# Altium PCB PCB_2darlington.PcbDoc
Units mm, origin at the board's own origin, x right, y up, seen from the top; angles counter-clockwise.
Board outline 150 x 100 mm, 2 copper layers (Top Layer, Bottom Layer); 45 components, 31 nets, 106 pads, 14 vias.
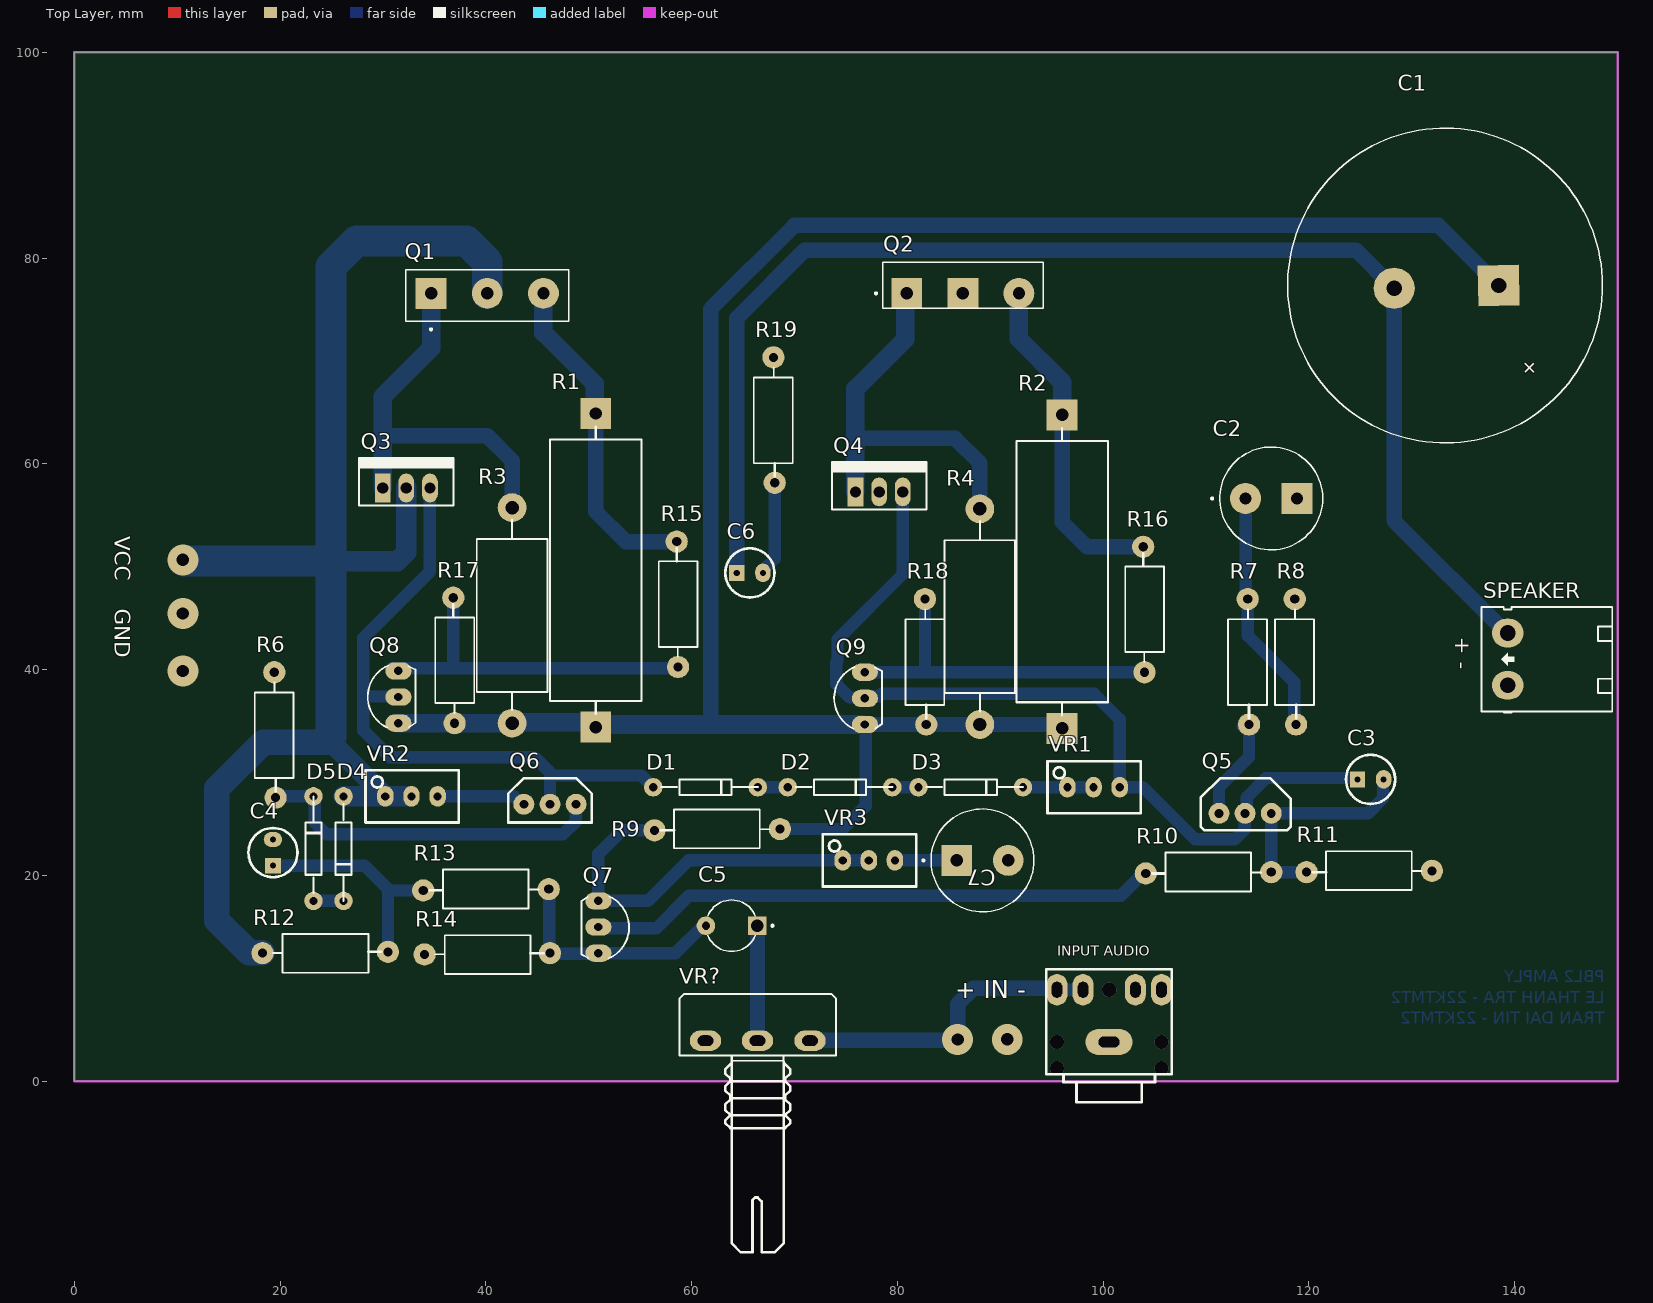
[diagram p0: Top Layer view]
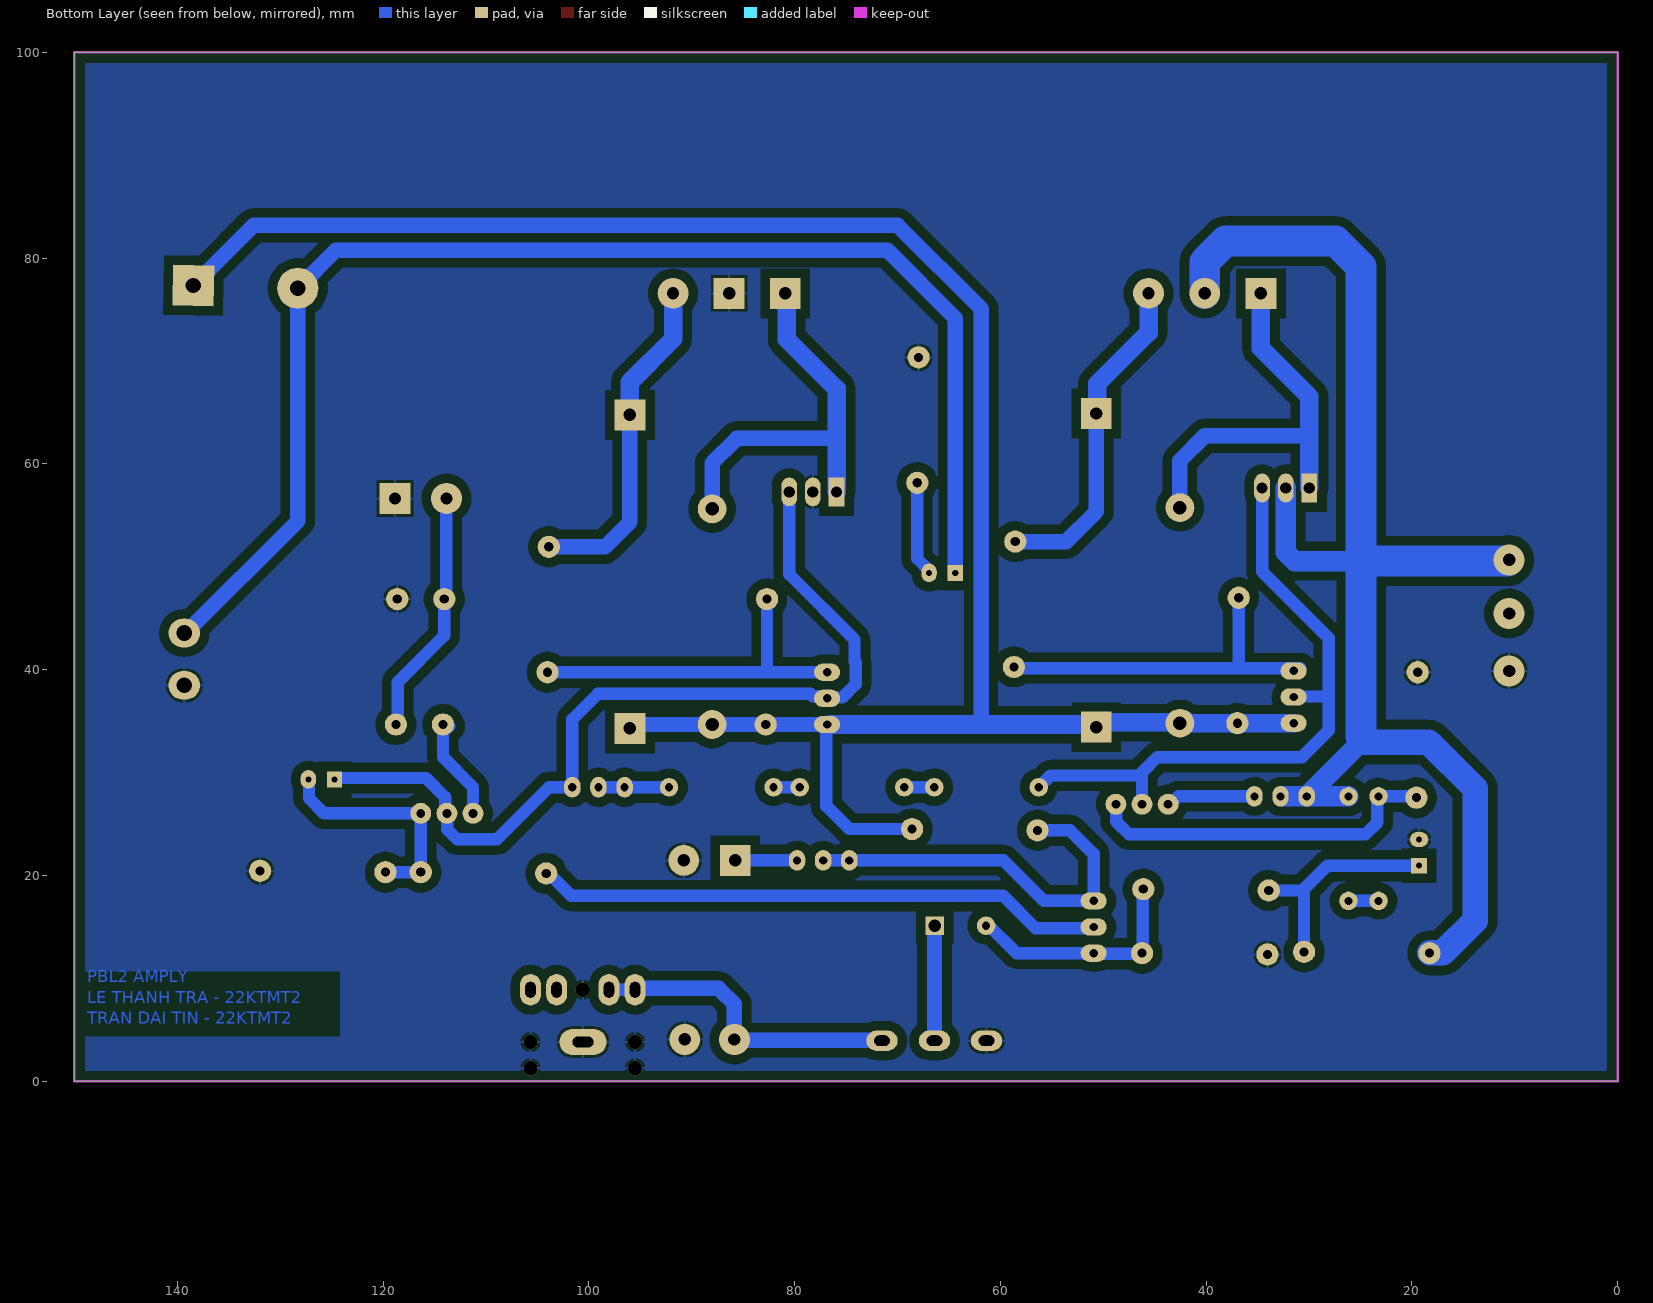
[diagram p1: Bottom Layer view, seen from below]
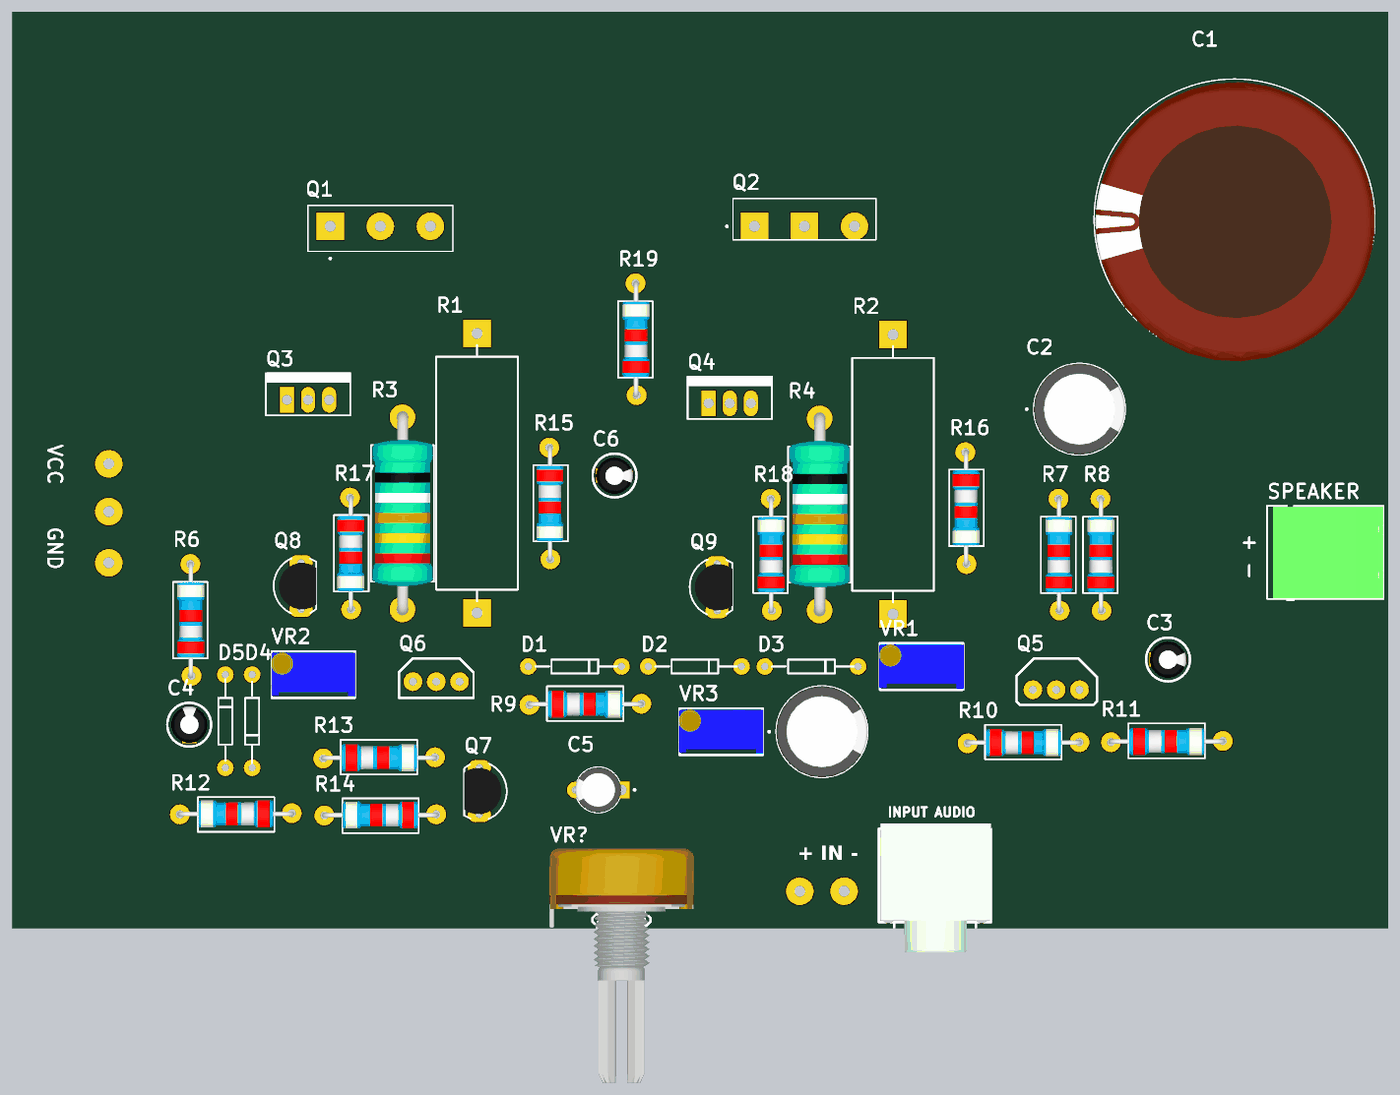
[diagram p2: 3D render of the assembled board from above, using the file's embedded part models]

## Layer stack, top to bottom
Top Solder: solder mask 0.0102, Solder Resist, Dk 3.5
Top Layer: signal copper 0.0356
Dielectric 1: dielectric 0.32, FR-4, Dk 4.8
Bottom Layer: signal copper 0.0356
Bottom Solder: solder mask 0.0102, Solder Resist, Dk 3.5

## Board outline
0,0 150,0 150,100 0,100
board region "Default Layer Stack Region": 0,0 150,0 150,100 0,100
board region "Default Layer Stack Region": 0,0 150,0 150,100 0,100
board region "Default Layer Stack Region": 0,0 150,0 150,100 0,100
board region "Default Layer Stack Region": 0,0 150,0 150,100 0,100
board region "Default Layer Stack Region": 0,0 150,0 150,100 0,100
board region "Default Layer Stack Region": 0,0 150,0 150,100 0,100
board region "Layer Stack Region 1": 0,0 150,0 150,100 0,100
board region "Default Layer Stack Region": 0,0 150,0 150,100 0,100

## Design rules (kind name [scope] priority, off if disabled: settings)
Clearance [All] p1: gap=0.9 ignorepadtopadclearanceinfootprint=FALSE
PolygonConnect [All] p1: connectstyle=Relief reliefconductorwidth=0.254 reliefentries=4 polygonreliefangle="90 Angle" airgapwidth=0.254
RoutingVias [All] p1: holewidth=0.711 width=1.27 viastyle="Through Hole" minholewidth=0.711 minwidth=1.27 maxholewidth=0.711 maxwidth=1.27
SolderMaskExpansion [All] p1: expansion=0.102 istentingtop=FALSE
Width GND [InNet('GND')] p1: maxlimit=2.5 minlimit=1.5 preferedwidth=2
Width VCC [InNet('VCC')] p2: maxlimit=2.5 minlimit=1.5 preferedwidth=2
Width [All] p3: maxlimit=1.5 minlimit=0.8 preferedwidth=1.2
30 further rules are at their usual default settings.

## Classes and differential pairs
component class Sheet1: C2 C3 C4 C5 C6 C7 D1 D2 D3 D4 D5 Q1 Q2 Q3 Q5 Q6 Q7 Q8 Q9 R1 R2 R6 R7 R8 R9 R10 R11 R12 R13 R14 R15 R16 R17 R18 R19 VR1 VR2

## Components (designator, comment, footprint, x,y, rotation, side; value= is the part's Value field where it differs from the comment)
C1 "Comment" CA-ALU-30 133.223,77.343 r135 top
C2 "EEUTA1H101" CAPPRD500W60D1000H1250#1 116.332,56.642 r0 top
C3 "100p" CA-ALU-2.54 125.984,29.337 r0 top value=104
C4 "CN-ALU-DIP" CA-ALU-2.54 19.304,22.225 r90 top value=104
C5 "EEUHD1HR10B" CAPPRD500W50D500H1100 63.881,15.113 r180 top
C6 "CN-ALU-DIP" CA-ALU-2.54 65.659,49.403 r0 top value=104
C7 "EEUTA1H101" CAPPRD500W60D1000H1250#2 88.265,21.463 r0 top
D1 "DIODE" diode 61.341,28.575 r0 top
D2 "DIODE" diode 74.422,28.575 r0 top
D3 "DIODE" diode 87.122,28.575 r0 top
D4 "DIODE" diode 26.162,22.606 r270 top
D5 "DIODE" diode 23.241,22.606 r90 top
"INPUT AUDIO" "Comment" "CON Phone2" 100.584,6.35 r180 top
Q1 "2SD718" TO546P1579X502X2688-3 40.133,76.581 r0 top
Q2 "2SB688" TO545P1560X450X2320-3 80.91,76.581 r0 top
Q3 "Comment" TO126 32.258,57.658 r0 top
Q4 "Comment" TO126 78.218,57.277 r0 top
Q5 "C2383" C2383 113.792,26.035 r0 top
Q6 "A1013" A1013 46.228,26.924 r0 top
Q7 "2SA1015" TO92-123 50.927,14.986 r270 top value=A1015
Q8 "2SC1815" TO92-123 31.496,37.338 r90 top value=C1815
Q9 "2SA1015" TO92-123 76.835,37.211 r90 top value=A1015
R1 "5W Res Power" "DIEN TRO 5W" 50.673,34.417 r90 top
R2 "5W Res Power" "DIEN TRO 5W" 96.012,64.77 r270 top
R3 "Comment" RES-2W 42.672,45.085 r90 top
R4 "Comment" RES-2W 88.138,44.958 r90 top
R6 "Res" RES-1/2W 19.431,33.147 r90 top
R7 "62" RES-1/2W 114.046,40.259 r90 top
R8 "100" RES-1/2W 118.618,40.259 r90 top
R9 "3k" RES-1/2W 61.976,24.511 r0 top
R10 "Res" RES-1/2W 109.728,20.32 r0 top
R11 "Res" RES-1/2W 125.349,20.447 r0 top
R12 "560k" RES-1/2W 24.892,12.446 r180 top
R13 "220k" RES-1/2W 39.497,18.669 r0 top
R14 "560k" RES-1/2W 40.64,12.319 r180 top
R15 "2k" RES-1/2W 58.674,46.863 r270 top
R16 "2k" RES-1/2W 104.013,46.355 r270 top
R17 "2k" RES-1/2W 36.957,41.402 r270 top
R18 "2k" RES-1/2W 82.677,40.259 r90 top
R19 "Res" RES-1/2W 67.945,63.754 r90 top
SPEAKER "Comment" HED2T 139.319,38.481 r90 top
VR1 "50" RVAR10K 99.06,28.575 r0 top value="VR 10K"
VR2 "200" RVAR10K 32.766,27.686 r0 top value="VR 10K"
VR3 "200" RVAR10K 77.216,21.463 r0 top value="VR 10K" (schematic designator VR2)
VR? "1k" VR-S1 66.421,3.937 r0 top value="Volume 50k"

## Footprints (in the part's own frame and the unit in brackets; to place one, negate y for a bottom-side part, rotate by r counter-clockwise, add the part's x,y. Pads: shape width x height; smd on the part's side, far side on the other; paste and mask are expansions set on the pad)
A1013 [mil]
  round 80 hole 34: 1(-100,0) 2(0,0) 3(100,0)
  silkscreen extent -160,-70 160,100
C2383 [mil]
  round 80 hole 34: 1(-100,0) 2(0,0) 3(100,0)
  silkscreen extent -170,-65 175,135
CA-ALU-2.54 [mm]
  rect 1.5x1.58 hole 0.6: 1(-1.27,0)
  oval 1.5x1.8 hole 0.6: 2(1.27,0)
  silkscreen extent -2.39,-2.39 2.39,2.39, body extent -2,-2.03 1.99,1.97, height 7.01
CA-ALU-30 [mm] "Polarized capacitors, Aluminum Electrolytic Capacitors, 2-Leads, Body 22x41x10x0.8"
  rect 4x4 hole 1.5 rot 136: 1(-3.683,-3.683)
  round 4 hole 1.5: 2(3.302,3.683)
  silkscreen extent -15.3,-15.3 15.3,15.3, body extent -21.81,-21.43 21.3,21.68, height 5.59
CAPPRD500W50D500H1100 [mm]
  round 1.8 hole 0.8: N(2.5,0)
  rect 1.8x1.8 / inner round 1.8 / far side rect 1.8x1.8 hole 1.2: P(-2.5,0)
  silkscreen extent -4.06,-2.5 2.32,2.5, body extent -2.75,-2.5 2.75,2.5, height 11
CAPPRD500W60D1000H1250#1 [mm]
  rect 3x3 hole 1.2: N(2.5,0)
  round 3 hole 1.2: P(-2.5,0)
  silkscreen extent -5.85,-5 5,5, body extent -5,-5 5,5, height 12.5
CAPPRD500W60D1000H1250#2 [mm]
  round 3 hole 1.2 mask-2539.97: N(2.5,0)
  rect 3x3 hole 1.2: P(-2.5,0)
  silkscreen extent -5.85,-5 5,5, body extent -5,-5 5,5, height 12.5
"CON Phone2" [mil]
  oval 80x120 hole 40 slot 60 at 90 deg: 1(-200,-100) 2(-100,-100) 3(100,-100) 4(200,-100)
  oval 180x100 hole 40 slot 80 at 0 deg: 5(1,100)
  silkscreen extent -240,-178 241,330, body extent -239,-202 233,354, height 394
"DIEN TRO 5W" [mm]
  rect 3x3 hole 1.2: 1(0,0) 2(30.48,0)
  silkscreen extent 1.27,-4.44 29.21,4.45, body extent 2.54,-4.44 27.94,4.45, height 7.62
diode [mm] "Diode"
  round 1.8 hole 0.8: 1(-5.08,0) 2(5.08,0)
  silkscreen extent -4.32,-0.76 5.08,0.76
HED2T [mil] "Header 2, 2 pin, hight 300mil, Pin to Pin 200, Colour Green"
  oval 110x120 hole 60: 1(0,0) 2(200,0)
  silkscreen extent -105,-400 300,100, body extent -97,-399 297,73, height 334
RES-1/2W [mil]
  round 85 hole 35: 1(-220,-5) 2(260,0)
  silkscreen extent -195,-74 221,75, body extent -230,-60 270,56, height 121
RES-2W [mil] "R2W, 2 pin, 700mil"
  round 110 hole 51.18: 1(-405,5) 2(420,5)
  silkscreen extent -355,-130 375,140, body extent -428,-126 446,134, height 277
RVAR10K [mm] "Bien tro vi chinh"
  oval 1.6x2 hole 0.8: 1(-2.54,0) 2(0,0) 3(2.54,0)
  silkscreen extent -4.47,-2.54 4.6,2.54, body extent -4.54,-2.4 4.66,2.4, height 12.02
TO92-123 [mil] "TO-92"
  oval 66x100 hole 32: 1(-100,0) 2(0,0) 3(100,0)
  silkscreen extent -117,-65 120,118, body extent -109,-66 109,95, height 245
TO126 [mil] "TO, Thru-Hole, Vertical, Heatsink Mounted; 3 In-Line Leads; Pitch 2.54 mm; Pin sequence 1, 3, 2"
  rect 60x110 hole 43.31: 1(-90.55,0)
  oval 60x110 hole 43.31: 2(0,0) 3(90.55,0)
  silkscreen extent -181,-67 181,114
TO545P1560X450X2320-3 [mm]
  rect 3x3 hole 1.2: 1(0,0) 2(5.45,0)
  round 3 hole 1.2: 3(10.9,0)
  silkscreen extent -3.1,-1.47 13.25,3.03
TO546P1579X502X2688-3 [mm]
  rect 3x3 hole 1.2: 1(-5.46,0)
  round 3 hole 1.2: 2(0,0) 3(5.46,0)
  silkscreen extent -7.9,-3.6 7.9,2.29
VR-S1 [mil]
  oval 120x78.74 hole 40 slot 60 at 0 deg: 1(-200,0) 2(-1,0) 3(200,0)
  silkscreen extent -299,-810 300,179, body extent -310,-818 310,188, height 839

## Part data
C2 C7: "Cap Aluminum Lytic 100uF 50V 20% (10 X 12.5mm) Radial 5mm 555mA 2000h 125Â°C Automotive Bulk", Package="RADIAL-2 Panasonic", Check_prices=https://www.snapeda.com/parts/EEUTA1H101/Panasonic/view-part/2305858/?ref=eda, Digi-Key_Part_Number=10-EEU-TA1H101BCT-ND, MF=Panasonic, MP=EEUTA1H101, SnapEDA_Link=https://www.snapeda.com/parts/EEUTA1H101/Panasonic/view-part/2305858/?ref=snap
C3: library part CN-ALU-DIP, "Capacitor (Semiconductor SIM Model)", LatestRevisionDate=17-Jul-2002, LatestRevisionNote="Re-released for DXP Platform.", PackageReference=C1206, Publisher="Altium Limited"
C4 C6: "Capacitor (Semiconductor SIM Model)", LatestRevisionDate=17-Jul-2002, LatestRevisionNote="Re-released for DXP Platform.", PackageReference=C1206, Publisher="Altium Limited"
C5: "CAP ALUM 0.1UF 20% 50V RADIAL", Package="RADIAL-2 Panasonic", Availability="In Stock", Check_prices=https://www.snapeda.com/parts/EEUHD1HR10B/Panasonic/view-part/5793058/?ref=eda, MF=Panasonic, MP=EEUHD1HR10B, Price=None, SnapEDA_Link=https://www.snapeda.com/parts/EEUHD1HR10B/Panasonic/view-part/5793058/?ref=snap
D1 D2 D3 D4 D5: "Diode"
Q1: "Position Header Spacer Connector", Package=None, Availability="Not in stock", Check_prices=https://www.snapeda.com/parts/2SD718/Toshiba/view-part/?ref=eda, MF=Toshiba, MP=2SD718, Price=None, SnapEDA_Link=https://www.snapeda.com/parts/2SD718/Toshiba/view-part/?ref=snap
Q2: "Bipolar Transistors - BJT Pb TO3PI PLS PLN-N,DISCON(01-12)/PHASE-OUT(05-07)/OBSOLETE(07-10),", Package=None, Availability=Unavailable, Check_prices=https://www.snapeda.com/parts/2SB688/Inchange%20Semiconductor/view-part/583109/?ref=eda, MF="Inchange Semiconductor", MP=2SB688, Price=None, SnapEDA_Link=https://www.snapeda.com/parts/2SB688/Inchange%20Semiconductor/view-part/583109/?ref=snap
Q3: library part 2SD882, "SMALL SIGNAL BIPOLAR TRANSTR NPN", Package="TO-126-3 NEC", Availability=Unavailable, MF=STMicroelectronics, MP=2SD882, Price=None, SnapEDA_Link=https://www.snapeda.com/parts/2SD882/STMicroelectronics/view-part/2778475/?ref=snap
Q5: library part "TRAN C2383"
Q7 Q9: "PNP 600mW, ECB"
Q8: "NPN 600mW, ECB"
R1 R2: library part "Res 5W", Creator="Nguyen Ba Bien"
R6 R10 R11 R19: Manufacturer="Generic Components", Class=Passive, Published=08/06/2000, Publisher="Altium Hobart Technology Centre", SubClass=R
R7 R8 R9 R12 R13 R14 R15 R16 R17 R18: library part Res, "Res", Manufacturer="Generic Components", Class=Passive, Published=08/06/2000, Publisher="Altium Hobart Technology Centre", SubClass=R
VR1 VR2 VR3: library part "Var Resitor", "Var Resistor"
VR?: library part VR-S, "Var Resistor"

## Via types
v1: diameter 1.397, hole 1.397, Top Layer to Bottom Layer, 5 vias
v2: diameter 3, hole 1.2, Top Layer to Bottom Layer, 5 vias
v3: diameter 1.27, hole 0.711, Top Layer to Bottom Layer, 4 vias

## Nets (pads, with @x,y where several pads share a name; then routed paths per layer and width w, separated by ;. In a path a pad name is that pad's centre, name@x,y a point inside that pad or via, vN(x,y) a via of type N, cw(c..) or ccw(c..) an arc to the next point about the centre after c; other vN are vias at no path point)
GND: "INPUT AUDIO.5" C2.N C4.2 C7.N Q2.2 Q4.2 R6.2 R8.2 R11.2 R14.2 R19.2 SPEAKER.1 VR?.1
  other v1: 95.504,1.27 105.664,1.27 95.504,3.81 105.664,3.81 100.584,8.89
  other v2: 90.678,4.064 10.541,39.878
  other v3: 95.504,1.27 105.664,1.27 95.504,3.81 105.664,3.81
NetC1_N: C1.2 SPEAKER.2 | length 131.1
  Bottom Layer w1.5: 64.389,49.403 64.389,74.168 70.993,80.772 124.585,80.772 C1.2 128.284,54.469 139.192,43.561 SPEAKER.2
NetC1_P: C1.1 Q8.1 Q9.1 R1.1 R2.2 R3.1 R4.1 R9.2 R17.2 R18.1 | length 205
  Bottom Layer w1.2: R3.1@42.037,34.798 R3.1@42.22,34.615 ; R1.1@50.221,34.869 R1.1@50.419,34.671 ; R9.2 74.676,24.511 76.906,26.741 76.906,34.6 Q9.1 Q9.1@76.532,34.671
  Bottom Layer w1.5: 61.849,34.671 61.849,75.057 69.977,83.185 132.59,83.185 C1.1 ; Q9.1 R18.1 88.265,34.671 95.377,34.671 R2.2@96.012,34.036
  Bottom Layer w1.8: Q8.1 R17.2 41.686,34.798 41.94,35.052 R3.1@42.037,35.052 ; R3.1@42.22,34.869 R1.1@50.221,34.869 ; R1.1@50.419,34.671 61.849,34.671 Q9.1@76.532,34.671
NetC2_P: C2.P R7.2 R8.1 | length 24
  Bottom Layer w1.2: C2.P@113.863,56.611 113.863,47.046 R7.2 114.046,43.307 118.562,38.791 118.562,34.854 R8.1
NetC3_1: C3.1 Q4.3 Q5.2 Q9.2 VR1.3 | length 86
  Bottom Layer w1.2: Q4.3 80.518,49.276 74.168,42.926 74.168,40.823 74.065,40.72 74.065,38.584 75.347,37.302 76.744,37.302 Q9.2 76.926,37.302 77.695,37.302 77.805,37.413 78.235,37.413 78.474,37.651 99.128,37.651 101.6,35.179 VR1.3 ; VR1.3@101.727,28.575 103.859,28.575 108.915,23.519 112.8,23.519 113.768,24.487 113.768,26.011 Q5.2 113.951,26.194 113.951,27.591 115.824,29.464 C3.1@124.206,29.464
NetC3_2: C3.2 Q5.3 R10.2 R11.1 | length 22.3
  Bottom Layer w1.2: R11.1 116.713,20.32 116.713,20.58 116.332,20.961 Q5.3 125.73,26.035 127.197,27.502 127.197,29.28 C3.2
NetC4_1: C4.1 R12.1 R13.1 | length 21.3
  Bottom Layer w1.2: C4.1 28.194,20.955 30.48,18.669 R12.1 ; 30.802,18.542 R13.1
NetC5_N: C5.N Q7.3 R13.2 R14.1 | length 22.1
  Bottom Layer w1.2: R13.2@46.101,18.661 R13.2 46.164,18.605 R14.1@46.164,12.636 ; R14.1 46.291,12.383 Q7.3@50.927,12.383 ; Q7.3 58.42,12.446 C5.N@61.087,15.113
NetC5_P: C5.P VR?.2 | length 11.2
  Bottom Layer w1.5: C5.P 66.396,15.098 VR?.2
NetC6_1: C6.1
NetC6_2: C6.2 R19.1 | length 8.6
  Bottom Layer w1.2: C6.2 66.929,49.634 68.072,50.777 R19.1@68.072,57.531
NetC7_P: C7.P VR3.3 | length 7.1
  Bottom Layer w1.2: VR3.3 C7.P C7.P@85.003,20.701
NetD1_1: D1.1 Q3.3 Q6.2 Q8.2 | length 63.1
  Bottom Layer w1.2: Q8.2 31.444,37.39 28.091,37.39 ; Q3.3 34.558,49.544 28.091,43.077 28.091,37.39 ; Q6.2 46.228,29.718 ; D1.1 55.118,29.718 46.228,29.718 ; 28.091,37.39 28.091,34.083 30.678,31.496 44.745,31.496 46.228,30.013 46.228,29.718
NetD1_2: D1.2 D2.1 | length 2.9
  Bottom Layer w1.2: D1.2 D2.1
NetD2_2: D2.2 D3.1 | length 2.5
  Bottom Layer w1.2: D2.2 D3.1
NetD3_2: D3.2 VR1.1 VR1.2 | length 6.9
  Bottom Layer w1.2: D3.2 VR1.1 VR1.2
NetD4_2: D4.2 D5.1 | length 2.9
  Bottom Layer w1.2: D5.1 D4.2
NetD5_2: D5.2 Q6.3 R6.1 | length 34.4
  Bottom Layer w1.2: R6.1 19.685,27.686 D5.2 23.356,27.571 23.356,25.158 24.511,24.003 47.498,24.003 48.744,25.249 48.744,26.9 Q6.3
NetQ1_1: Q1.1 Q3.1 R3.2 | length 39
  Bottom Layer w1.5: 29.958,62.738 40.132,62.738 42.545,60.325 R3.2
  Bottom Layer w1.8: Q3.1 29.958,62.738 29.958,66.534 34.673,71.249 Q1.1
NetQ1_3: Q1.3 R1.2 R15.1 | length 32.4
  Bottom Layer w1.5: R1.2@50.596,64.974 R1.2 50.673,55.372 53.594,52.451 R15.1
  Bottom Layer w1.8: Q1.3 45.593,72.771 50.596,67.768 R1.2@50.596,64.974
NetQ2_1: Q2.1 Q4.1 R4.2 | length 38.9
  Bottom Layer w1.2: 75.918,62.484 76.073,62.484
  Bottom Layer w1.5: 76.073,62.484 85.598,62.484 88.011,60.071 R4.2 ; Q2.1@80.772,76.443 Q2.1
  Bottom Layer w1.8: Q4.1 75.918,62.484 75.918,67.282 80.772,72.136 Q2.1@80.772,76.443
NetQ2_3: Q2.3 R2.1 R16.1 | length 32.6
  Bottom Layer w1.5: R2.1@96.012,64.516 96.012,54.356 98.425,51.943 R16.1@103.625,51.943
  Bottom Layer w1.8: Q2.3 91.81,72.147 96.012,67.945 R2.1@96.012,64.516
NetQ5_1: Q5.1 R7.1 | length 10.5
  Bottom Layer w1.2: Q5.1 111.252,28.575 114.173,31.496 R7.1 113.99,34.488 R7.1@113.548,34.488
NetQ6_1: Q6.1 VR2.3 | length 8.7
  Bottom Layer w1.2: VR2.3 42.701,27.686 43.463,26.924 Q6.1
NetQ7_1: Q7.1 R9.1 VR3.1 VR3.2 | length 39.1
  Bottom Layer w1.2: Q7.1@50.714,17.526 55.753,17.526 59.69,21.463 VR3.2 ; Q7.1 50.927,22.098 53.213,24.384 R9.1
NetQ7_2: Q7.2 R10.1 | length 55.4
  Bottom Layer w1.2: Q7.2@50.927,14.859 56.561,14.859 59.736,18.034 101.721,18.034 103.88,20.193 R10.1
NetQ8_3: Q8.3 R15.2 R17.1 | length 34.7
  Bottom Layer w1.2: Q8.3@30.861,40.132 31.623,40.132 36.83,40.132 58.547,40.132 R15.2 ; 36.83,40.386 R17.1@36.83,47.244
NetQ9_3: Q9.3 R16.2 R18.2 | length 34.3
  Bottom Layer w1.2: Q9.3 82.677,39.751 ; R18.2 82.677,39.751 ; R16.2 82.677,39.751
NetRX_1: 
NetVR?_1: "INPUT AUDIO.3" "INPUT AUDIO.4" VR?.3 | length 30.7
  Bottom Layer w1.2: VR?.3 VR?.3@71.56,3.996 ; v2@85.793,3.996 v2(85.852,4.056) ; 95.377,9.017 95.504,8.89 98.044,8.89
  Bottom Layer w1.5: VR?.3@71.56,3.996 v2@85.793,3.996 ; v2(85.852,4.056) 85.852,7.493 87.376,9.017 95.377,9.017
VCC: D4.1 Q1.2 Q3.2 R12.2 VR2.1 VR2.2 | length 139.5
  Bottom Layer w2: v2(10.541,50.673) v2@10.668,50.546 ; R12.2@18.258,12.476 R12.2 ; 24.958,32.954 VR2.1 ; 24.958,50.546 26.289,50.546 31.379,50.546 32.258,51.425 Q3.2 ; D4.1 VR2.1 ; VR2.2@32.512,27.686 VR2.1
  Bottom Layer w2.5: R12.2@18.258,12.476 16.988,12.476 13.843,15.621 13.843,28.448 18.349,32.954 24.958,32.954
  Bottom Layer w3: v2@10.668,50.546 24.958,50.546 ; 24.958,33.462 24.958,50.546 ; Q1.2 40.133,79.628 38.1,81.661 27.432,81.661 24.958,79.187 24.958,50.546
pads on no net: "INPUT AUDIO.1" "INPUT AUDIO.2"
copper on no net:
  other v2: 10.541,45.466

## Polygon pours and split planes (outlines as drawn)
GND on Bottom Layer "tm" (solid, pour order 0): -0.134,100.234 0.12,100.234 149.98,100.234 149.98,-0.096 -0.134,-0.096

## Keep-outs
Keep-Out Layer:
  the board outline again, w0.254

## Other copper
Bottom Layer:
  text "PBL2 AMPLY / LE THANH TRA - 22KTMT2 / TRAN DAI TIN - 22KTMT2" at 148.747,5.207 h2

## Silkscreen, mask and mechanical layers (free items; w line width, h text height)
Top Overlay:
  text "VCC    GND" at 3.937,52.959 h1.52 r270
  text "+ -" at 134.239,43.18 h1.52 r270
  text "+ IN -" at 85.601,7.485 h3

## Text inside footprints (layer, text, board x,y; h text height)
C1: Top Overlay "+" at 142.459,69.149 h1.5 r135